# Altium PCB Panel_V1.0.PcbDoc
Units mm, origin at the board's own origin, x right, y up, seen from the top; angles counter-clockwise.
Board outline 128.11 x 48.51 mm, 2 copper layers (Top Layer, Bottom Layer); 4 components, 0 nets, 12 pads, 60 vias.
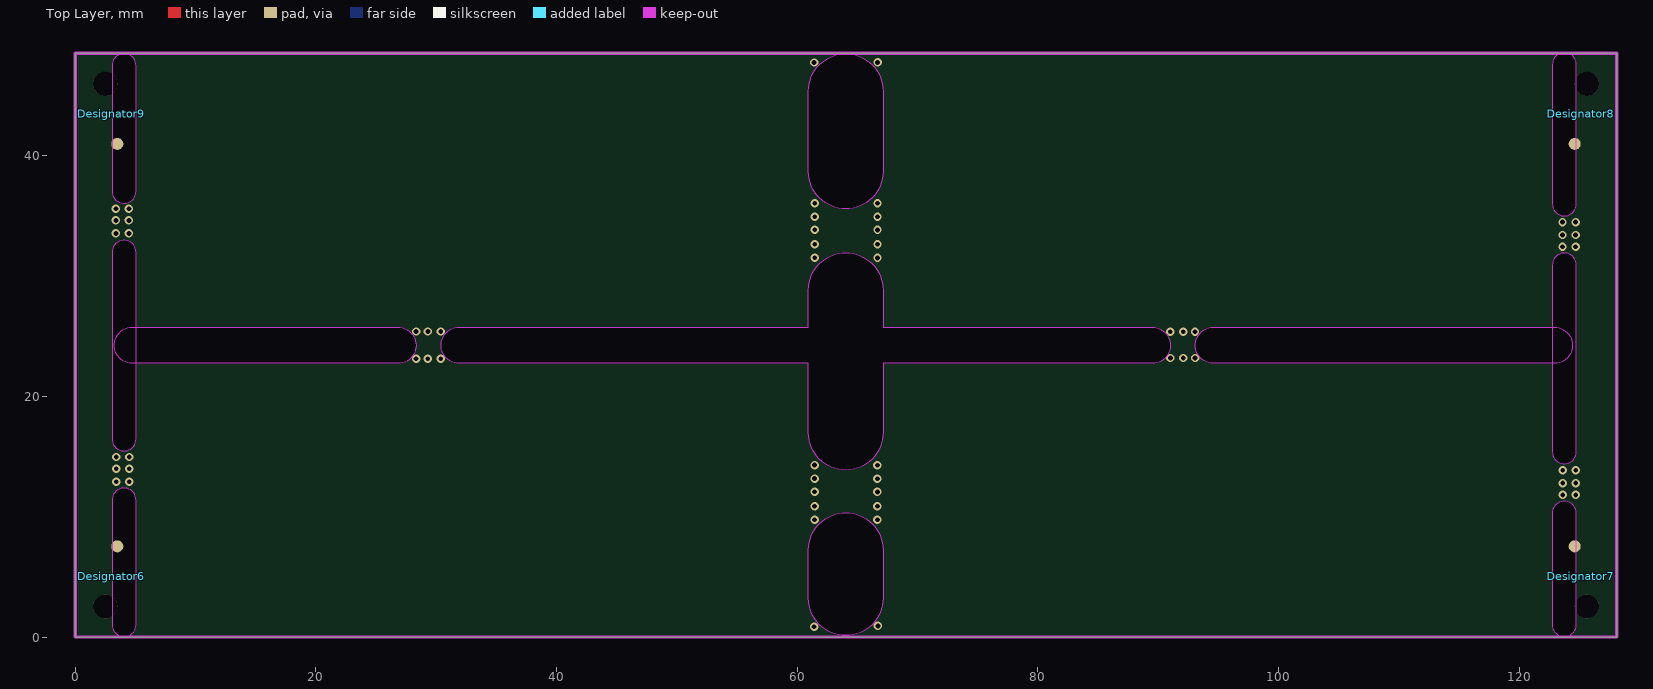
[diagram p0: Top Layer view]
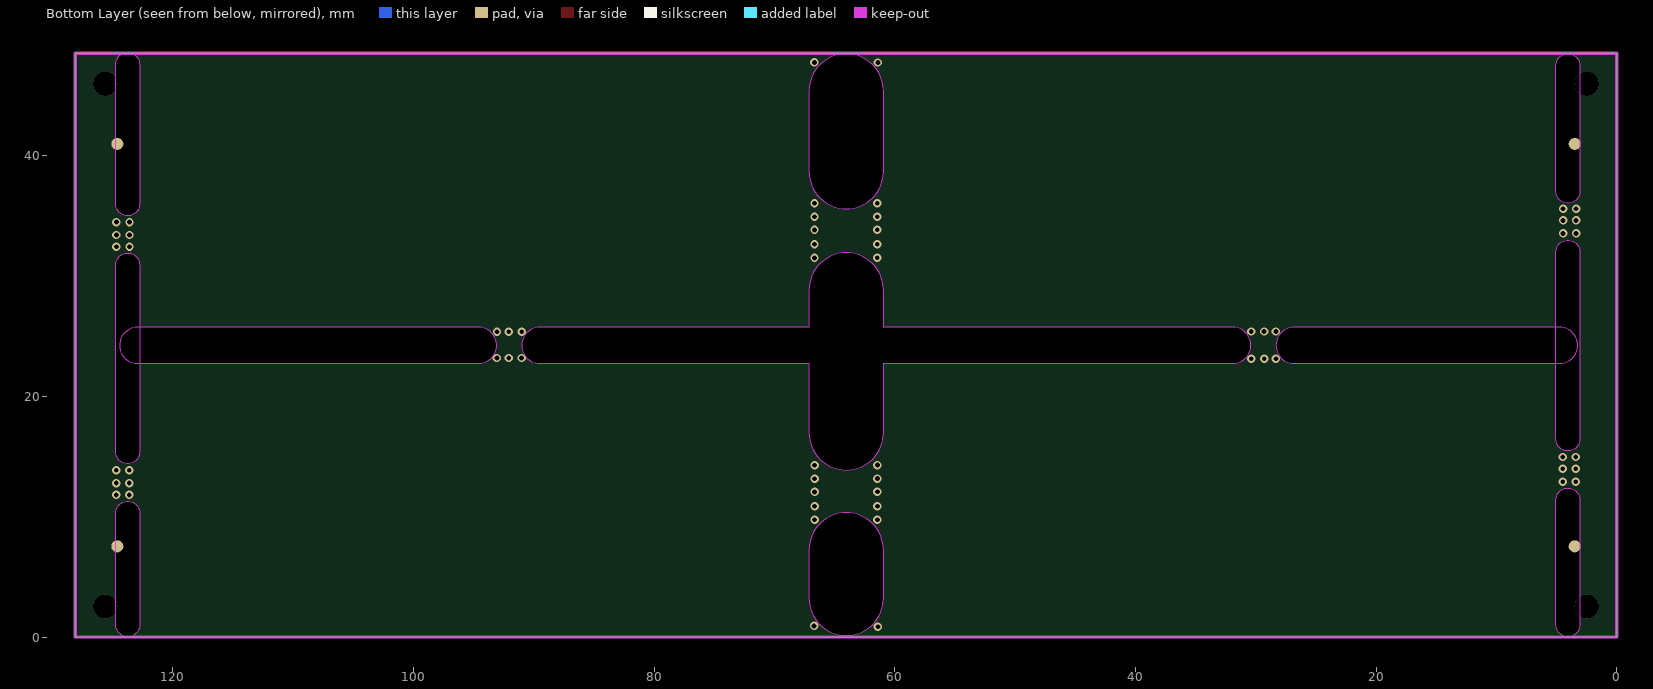
[diagram p1: Bottom Layer view, seen from below]

## Layer stack, top to bottom
Top Solder: solder mask 0.0102, Solder Resist, Dk 3.5
Top Layer: signal copper 0.0356
Dielectric 1: dielectric 0.32, FR-4, Dk 4.8
Bottom Layer: signal copper 0.0356
Bottom Solder: solder mask 0.0102, Solder Resist, Dk 3.5

## Board outline
-0.001,0 -0.001,48.515 128.109,48.515 128.109,0
cut-out: 3.058,1.03 ccw(c4.058,1.03) 5.059,1.03 5.059,11.382 ccw(c4.058,11.382) 3.058,11.382
cut-out: 3.058,16.462 ccw(c4.058,16.462) 5.059,16.462 5.059,31.972 ccw(c4.058,31.972) 3.058,31.972
cut-out: 4.741,22.736 cw(c4.741,24.236) 4.741,25.737 26.825,25.737 cw(c26.825,24.236) 28.325,24.236 cw(c26.825,24.236) 26.825,22.736
cut-out: 3.058,37.052 ccw(c4.058,37.052) 5.059,37.052 5.059,47.484 ccw(c4.058,47.484) 3.058,47.484
cut-out: 60.931,38.685 60.931,45.371 cw(c64.031,45.371) 67.132,45.371 67.132,38.685 cw(c64.031,38.685)
cut-out: 60.931,3.227 60.931,7.233 cw(c64.031,7.233) 67.132,7.233 67.132,3.227 cw(c64.031,3.227)
cut-out: 122.743,1.03 ccw(c123.744,1.03) 124.744,1.03 124.744,10.279 ccw(c123.744,10.279) 122.743,10.279
cut-out: 122.755,35.993 ccw(c123.755,35.993) 124.756,35.993 124.756,47.575 ccw(c123.755,47.575) 122.755,47.575
cut-out: 122.755,15.403 ccw(c123.755,15.403) 124.756,15.403 124.756,30.913 ccw(c123.755,30.913) 122.755,30.913
cut-out: 94.586,22.736 cw(c94.586,24.236) 94.586,25.737 122.924,25.737 cw(c122.924,24.236) 124.425,24.236 cw(c122.924,24.236) 122.924,22.736
cut-out: 31.905,22.736 cw(c31.905,24.236) 31.905,25.737 60.931,25.737 60.931,28.833 cw(c64.031,28.833) 67.132,28.833 67.132,25.737 89.506,25.737 cw(c89.506,24.236) 91.006,24.236 cw(c89.506,24.236) 89.506,22.736 67.132,22.736 67.132,16.978 cw(c64.031,16.978) 60.931,16.978 60.931,22.736

## Design rules (kind name [scope] priority, off if disabled: settings)
Clearance [All] p1: gap=0.254 ignorepadtopadclearanceinfootprint=FALSE
PolygonConnect [All] p1: connectstyle=Relief reliefconductorwidth=0.254 reliefentries=4 polygonreliefangle="90 Angle" airgapwidth=0.254
RoutingVias [All] p1: holewidth=0.711 width=1.27 viastyle="Through Hole" minholewidth=0.711 minwidth=1.27 maxholewidth=0.711 maxwidth=1.27
SolderMaskExpansion [All] p1: expansion=0.102 istentingtop=FALSE
Width [All] p1: maxlimit=0.254 minlimit=0.254 preferedwidth=0.254
30 further rules are at their usual default settings.

## Components (designator, comment, footprint, x,y, rotation, side; value= is the part's Value field where it differs from the comment)
Designator6 "Comment" FM_004#1 2.494,2.537 r0 top
Designator7 "Comment" FM_004#2 125.614,2.537 r180 top
Designator8 "Comment" FM_004#1 125.614,45.978 r180 top
Designator9 "Comment" FM_004#2 2.494,45.978 r0 top

## Footprints (in the part's own frame and the unit in brackets; to place one, negate y for a bottom-side part, rotate by r counter-clockwise, add the part's x,y. Pads: shape width x height; smd on the part's side, far side on the other; paste and mask are expansions set on the pad)
FM_004#1 [mm]
  round 2 hole 2 unplated: 1(0,0)
  round 1 smd paste+0 mask+0.5: 1(1,5)
  round 1 smd far side paste+0 mask+0.5: 1(1,5)
FM_004#2 [mm]
  round 2 hole 2 unplated: 1(0,0)
  round 1 smd paste+0 mask+0.5: 1(1,-5)
  round 1 smd far side paste+0 mask+0.5: 1(1,-5)

## Via types
v1: diameter 0.7, hole 0.4, Top Layer to Bottom Layer, 60 vias

## Nets (pads, with @x,y where several pads share a name; then routed paths per layer and width w, separated by ;. In a path a pad name is that pad's centre, name@x,y a point inside that pad or via, vN(x,y) a via of type N, cw(c..) or ccw(c..) an arc to the next point about the centre after c; other vN are vias at no path point)
pads on no net: Designator6.1 Designator7.1 Designator8.1 Designator9.1
copper on no net:
  other v1: 61.399,0.857 66.704,0.922 61.446,9.748 66.662,9.742 66.662,10.865 61.446,10.872 123.615,11.813 124.697,11.813 61.446,12.07 66.662,12.063 123.615,12.79 124.697,12.79 3.404,12.908 4.486,12.908 61.446,13.163 66.662,13.157 123.615,13.863 124.697,13.863 3.404,13.982 4.486,13.982 61.446,14.286 66.662,14.28 3.404,14.959 4.486,14.959 28.322,23.119 29.3,23.119 30.373,23.119 91.014,23.187 92.087,23.187 93.064,23.187 28.325,25.392 29.302,25.392 30.376,25.392 91.008,25.375 92.082,25.375 93.059,25.375 61.457,31.517 66.673,31.51 123.602,32.429 124.684,32.429 66.673,32.633 61.457,32.64 123.602,33.407 124.684,33.407 3.376,33.545 4.458,33.545 61.457,33.838 66.673,33.832 123.602,34.48 124.684,34.48 3.376,34.619 4.458,34.619 61.457,34.931 66.673,34.925 3.376,35.596 4.458,35.596 61.457,36.054 66.673,36.048 61.4,47.746 66.675,47.75

## Keep-outs
Keep-Out Layer:
  the board outline again, w0.254

## Panel: embedded boards
"PCB_V1.0.PcbDoc" at 4.998,0.001, 2 rows x 2 columns, spacing 25.781 x 62.23, rotation 0